# EAGLE board PIC32 (EAGLE 9.3.2)

Size 160 x 100 mm. Coordinates in mm from the lower left corner, seen from the top.
Outline: 0,0 160,0 160,100 0,100 0,0
Copper layers (1*16): Top 0.035mm / dielectric 1.5mm / Bottom 0.035mm
Design rules "default": minimum track width 6mil, minimum drill 0.35mm, track to track 6mil, track to pad 6mil, pad to pad 6mil, via to via 6mil, smd to smd 6mil, copper to edge 40mil, drill to drill 6mil, minimum pad ring 10mil, minimum via ring 8mil, stop-mask expansion 4mil, vias tented up to drill 0mil, thermal gap 10mil

## Footprints (pad centres in the part's own frame; a part is rotated, then mirrored left to right if it is on the bottom)
C025-025X050 = drill 0.813 octagon: 1 -1.27,0; 2 1.27,0
B45181B = drill 0.813: + -2.54,0 | drill 0.813 octagon: - 2.54,0
1X08 = drill 1.016 pad 1.88: 1 0,0; 2 2.54,0; 3 5.08,0; 4 7.62,0; 5 10.16,0; 6 12.7,0; 7 15.24,0; 8 17.78,0
LED3MM = drill 0.813 octagon: A -1.27,0; K 1.27,0
0207/10 = drill 0.813 octagon: 1 -5.08,0; 2 5.08,0
TQFP44 = smd 1.5 x 0.5: 1 -5.8,4; 2 -5.8,3.2; 3 -5.8,2.4; 4 -5.8,1.6; 5 -5.8,0.8; 6 -5.8,0; 7 -5.8,-0.8; 8 -5.8,-1.6; 9 -5.8,-2.4; 10 -5.8,-3.2; 11 -5.8,-4; 23 5.8,-4; 24 5.8,-3.2; 25 5.8,-2.4; 26 5.8,-1.6; 27 5.8,-0.8; 28 5.8,0; 29 5.8,0.8; 30 5.8,1.6; 31 5.8,2.4; 32 5.8,3.2; 33 5.8,4 | smd 0.5 x 1.5: 12 -4,-5.8; 13 -3.2,-5.8; 14 -2.4,-5.8; 15 -1.6,-5.8; 16 -0.8,-5.8; 17 0,-5.8; 18 0.8,-5.8; 19 1.6,-5.8; 20 2.4,-5.8; 21 3.2,-5.8; 22 4,-5.8; 34 4,5.8; 35 3.2,5.8; 36 2.4,5.8; 37 1.6,5.8; 38 0.8,5.8; 39 0,5.8; 40 -0.8,5.8; 41 -1.6,5.8; 42 -2.4,5.8; 43 -3.2,5.8; 44 -4,5.8
USB-B-MICRO-SMD_V04 = smd 1.958 x 0.4: D+1 2.725,0; D-1 2.725,0.65; GND1 2.725,-1.3; ID1 2.725,-0.65; VBUS1 2.725,1.3 | drill 0.508: P$1 0,0; P$2 0,-3.81; P$3 0,3.81 | smd 1.5 x 1.8: SHIELD1 0,3.685; SHIELD2 0,-3.685 | hole 0.85: 2.2,1.9; 2.2,-1.9
SLIDE = drill 0.8: 1 -2,0; 2 0,0; 3 2,0 | drill 1: P$1 -4,0; P$2 4,0
TO92- = drill 0.813 octagon: 1 -2.54,0; 2 0,0; 3 2.54,0
PUSHBOTTON = drill 1.016 pad 1.88: 1 -2.54,0; 2 2.54,0
1X05 = drill 1.016 pad 1.88: 1 0,0; 2 2.54,0; 3 5.08,0; 4 7.62,0; 5 10.16,0
OSC = drill 1.016 pad 1.88: 1 -2.54,0; 2 0,0; 3 2.54,0

## Placement (x,y rotation side)
C1  0.1uF  [C025-025X050]  -16.51,29.21 0 top  (outside the outline)
C2  0.1uF  [C025-025X050]  -22.86,29.21 0 top  (outside the outline)
C3  0.1uF  [C025-025X050]  -29.21,29.21 0 top  (outside the outline)
C4  0.1uF  [C025-025X050]  -35.56,29.21 0 top  (outside the outline)
C5  10uF  [B45181B]  -21.59,20.32 0 top  (outside the outline)
C6  10uF  [B45181B]  -34.29,20.32 0 top  (outside the outline)
J1  [1X08]  -33.02,50.8 0 top  (outside the outline)
J2  [1X08]  -33.02,54.61 0 top  (outside the outline)
J3  [1X08]  -33.02,58.42 0 top  (outside the outline)
LED1-RED  [LED3MM]  -53.34,46.99 0 top  (outside the outline)
LED2-GREEN  [LED3MM]  -39.37,46.99 0 top  (outside the outline)
R1  [0207/10]  -19.05,40.64 0 top  (outside the outline)
R2  330  [0207/10]  -31.75,40.64 0 top  (outside the outline)
R3  10K  [0207/10]  -44.45,40.64 0 top  (outside the outline)
R4  10K  [0207/10]  -19.05,45.72 0 top  (outside the outline)
U$1  PIC32MX270F256D  [TQFP44]  -20.32,8.89 0 top  (outside the outline)
U$2  USB-PLACEHOLDER  [USB-B-MICRO-SMD_V04]  -31.75,5.08 0 top  (outside the outline)
U$3  SLIDE  [SLIDE]  -49.53,20.32 0 top  (outside the outline)
U$4  L4931  [TO92-]  -40.64,3.81 0 top  (outside the outline)
U$5  PUSHBOTTON  [PUSHBOTTON]  -48.26,27.94 0 top  (outside the outline)
U$6  PUSHBOTTON  [PUSHBOTTON]  -22.86,35.56 0 top  (outside the outline)
U$7  SNAP  [1X05]  -39.37,35.56 0 top  (outside the outline)
U$8  OSC  [OSC]  -45.72,35.56 0 top  (outside the outline)

## Library data of the parts
C1-C6 = Parts; SPICEPREFIX: C
J1-J3 = Parts; PROD_ID: CONN-08438
LED1-RED LED2-GREEN U$1-U$8 = Parts
R1-R4 = Parts; SPICEPREFIX: R

## Nets
+3V3: C1.2 C2.1 C3.2 C6.- J1.7 J3.7 R1.2 R4.1 U$1.10 U$1.17 U$1.28 U$1.40 U$4.1 U$7.2
+5V: J2.7 U$1.42
A0: J1.1 U$1.19
A1: J1.2 U$1.20
A7: U$1.13
A8: U$1.32
A9: U$1.35
A10: U$1.12
B2: J1.3 U$1.23
B3: J1.4 U$1.24
B5: U$1.41
B7: J3.6 U$1.43
B8: J3.5 U$1.44
B9: J2.6 U$1.1
B10: J2.5 U$1.8
B11: J2.4 U$1.9
B13: J2.3 U$1.11
B14: J2.2 U$1.14
B15: J2.1 U$1.15
C0: J1.5 U$1.25
C1: J1.6 U$1.26
C2: U$1.27
C3: U$1.36
C4: U$1.37
C5: U$1.38
C6: J3.4 U$1.2
C7: J3.3 U$1.3
C8: J3.2 U$1.4
C9: J3.1 U$1.5
GND: C1.1 C2.2 C3.1 C4.2 C5.+ C6.+ J1.8 J2.8 J3.8 LED1-RED.K LED2-GREEN.K U$1.6 U$1.16 U$1.29 U$1.39 U$2.VBUS1 U$4.2 U$5.1 U$6.1 U$7.3 U$8.2
MCLR: R4.2 U$1.18 U$6.2 U$7.1
N$1: U$2.ID1 U$3.2
N$2: C5.- U$1.7
N$3: C4.1 U$3.3 U$4.3
N$4: LED1-RED.A R1.1
N$5: U$1.31 U$8.3
N$6: U$1.30 U$8.1
N$7: R3.2 U$1.33
N$8: R3.1 U$5.2
N$9: R2.1 U$1.34
N$10: LED2-GREEN.A R2.2
PGEC1: U$1.22 U$7.5
PGED1: U$1.21 U$7.4

## Tracks (layer width: path | path; a pad name or v marks a point on that pad's centre or on a via)
+3V3  (13 unrouted)
+5V  (1 unrouted)
A0  (1 unrouted)
A1  (1 unrouted)
B2  (1 unrouted)
B3  (1 unrouted)
B7  (1 unrouted)
B8  (1 unrouted)
B9  (1 unrouted)
B10  (1 unrouted)
B11  (1 unrouted)
B13  (1 unrouted)
B14  (1 unrouted)
B15  (1 unrouted)
C0  (1 unrouted)
C1  (1 unrouted)
C6  (1 unrouted)
C7  (1 unrouted)
C8  (1 unrouted)
C9  (1 unrouted)
GND  (20 unrouted)
MCLR  (3 unrouted)
N$1  (1 unrouted)
N$2  (1 unrouted)
N$3  (2 unrouted)
N$4  (1 unrouted)
N$5  (1 unrouted)
N$6  (1 unrouted)
N$7  (1 unrouted)
N$8  (1 unrouted)
N$9  (1 unrouted)
N$10  (1 unrouted)
PGEC1  (1 unrouted)
PGED1  (1 unrouted)